# Altium PCB PCB_V2-2_电源板.PcbDoc
Units mil, origin at the board's own origin, x right, y up, seen from the top; angles counter-clockwise.
Board outline 695.03 x 1245.03 mil, 2 copper layers (Top Layer, Bottom Layer); 20 components, 84 nets, 50 pads, 79 vias.
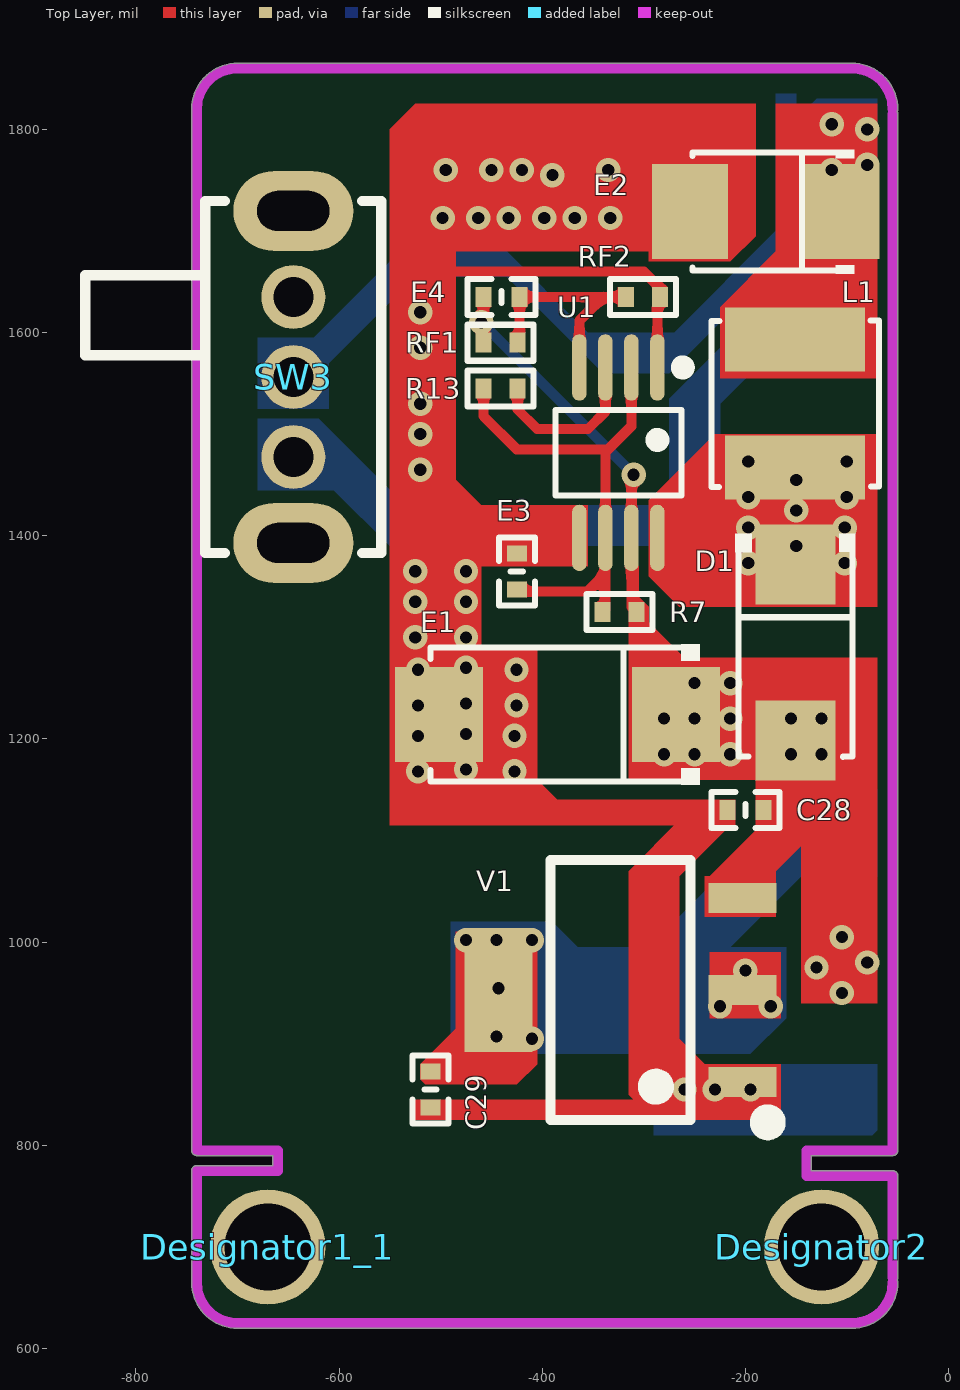
[diagram p0: Top Layer view]
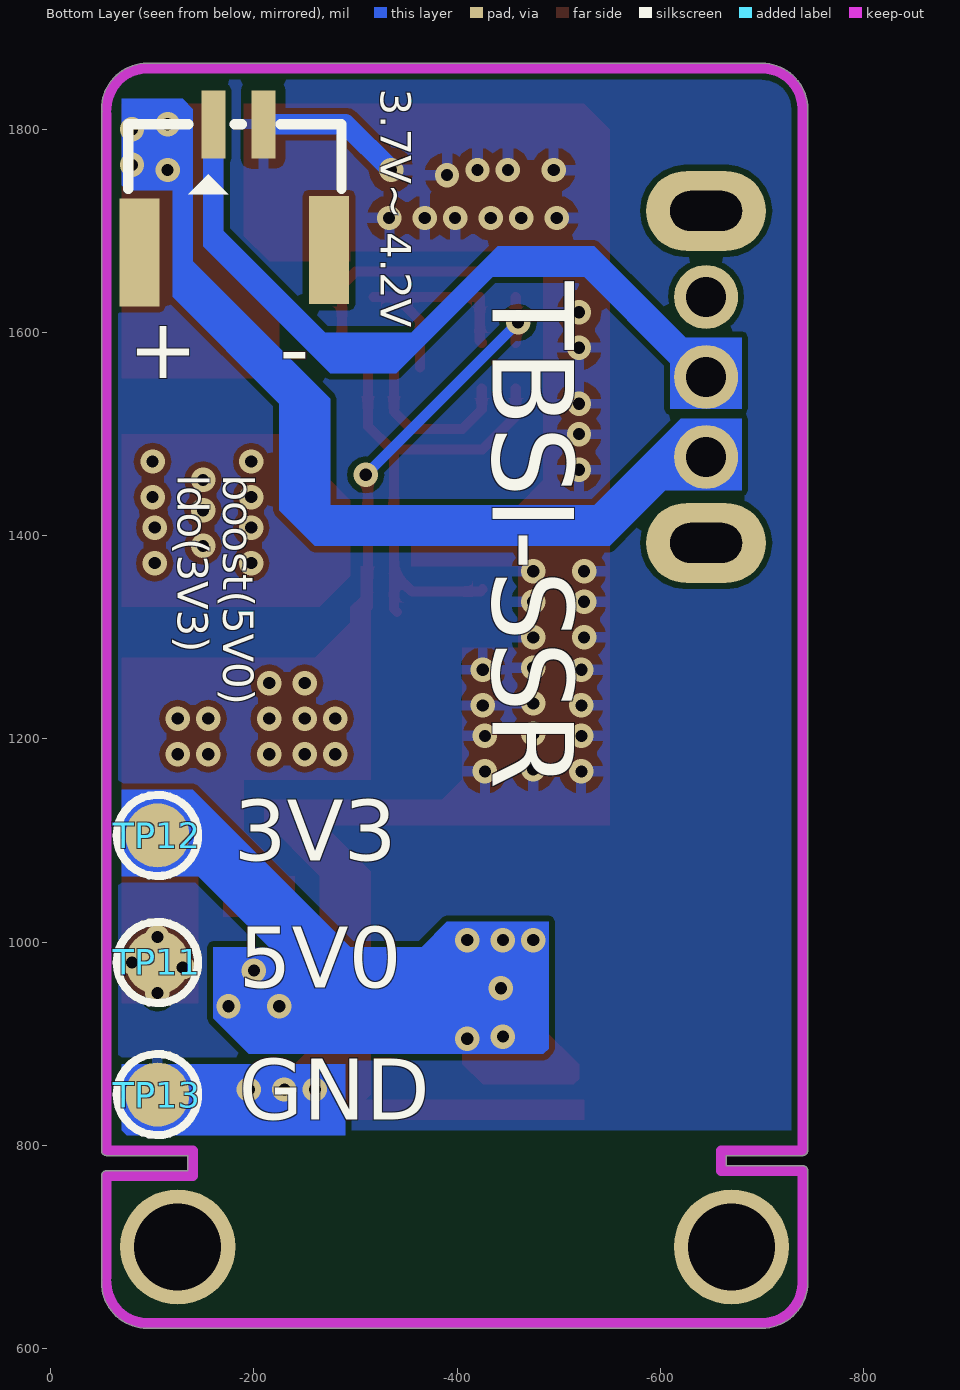
[diagram p1: Bottom Layer view, seen from below]
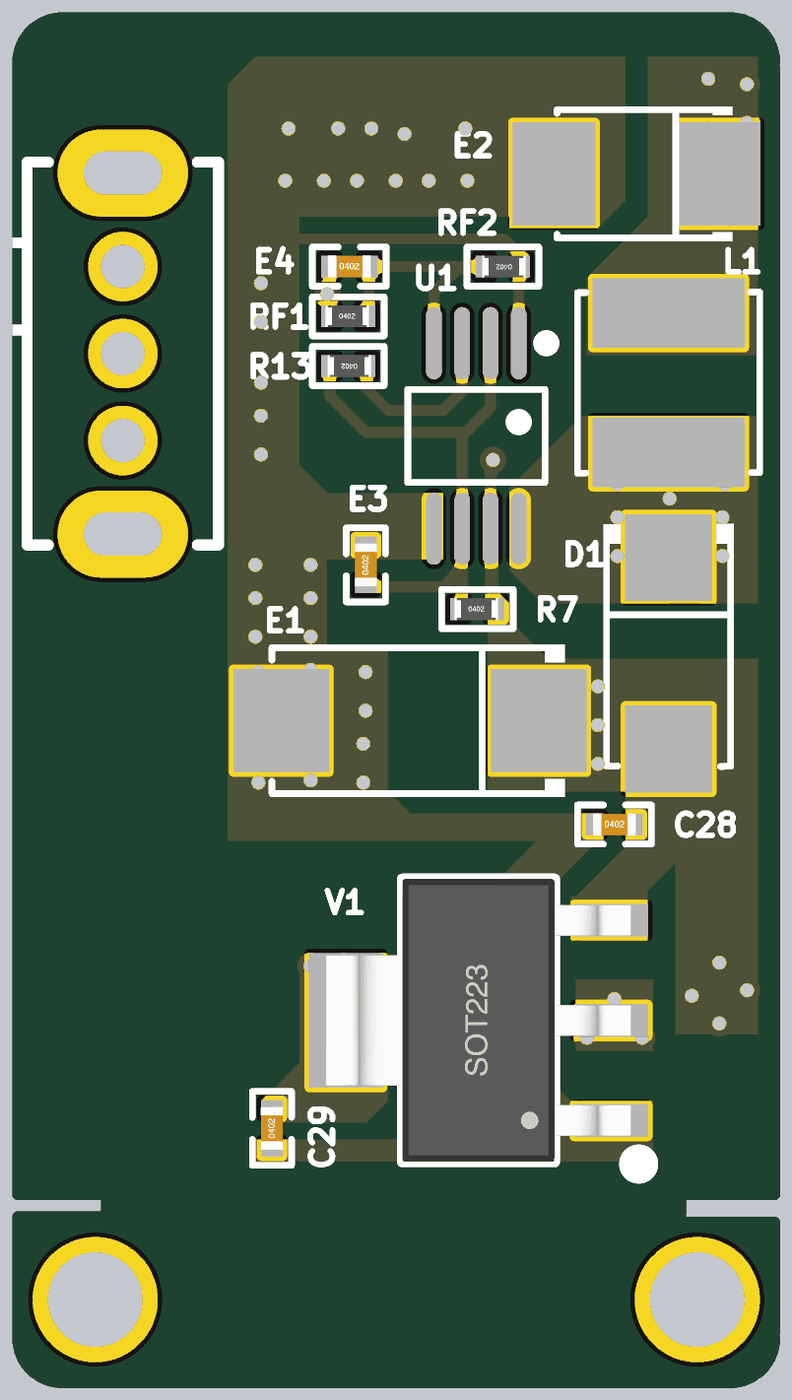
[diagram p2: 3D render of the assembled board from above, using the file's embedded part models]

## Layer stack, top to bottom
Top Solder: solder mask 0.4, Solder Resist, Dk 3.5
Top Layer: signal copper 1.4
Dielectric 1: dielectric 12.6, FR-4, Dk 4.8
Bottom Layer: signal copper 1.4
Bottom Solder: solder mask 0.4, Solder Resist, Dk 3.5

## Board outline
-745.01,665 ccw(c-700,665) -700,619.99 -95,619.99 ccw(c-95,665) -49.98,665 ccw(c-55,665) -50.65,667.5 ccw(c-55,670) -49.98,670 -49.98,770 ccw(c-55,770) -55,775.01 -134.98,775.01 -134.98,789.99 -55,789.99 ccw(c-55,795) -49.98,795 -49.98,1815 ccw(c-55,1815) -50.65,1817.5 ccw(c-55,1820) -49.98,1820 ccw(c-95,1820) -95,1865.01 -700,1865.01 ccw(c-700,1820) -745.01,1820 -745.01,795 ccw(c-740,795) -740,789.99 -665.01,789.99 -665.01,780.01 -740,780.01 ccw(c-740,775) -745.01,775

## Design rules (kind name [scope] priority, off if disabled: settings)
Clearance [All] p1: gap=6 ignorepadtopadclearanceinfootprint=FALSE except(0: Arc-Hole Track-Hole SMDPad-Hole THPad-Hole Via-Hole Fill-Hole Poly-Hole Region-Hole Text-Hole)
HoleToHoleClearance [All] p1: gap=4 allowstackedmicrovias=TRUE
MinimumSolderMaskSliver [All] p1: minsoldermaskwidth=4
PolygonConnect [All] p1: connectstyle=Relief reliefconductorwidth=10 reliefentries=4 polygonreliefangle="90 Angle" airgapwidth=10
RoutingVias [All] p1: holewidth=12 width=24 viastyle="Through Hole" minholewidth=12 minwidth=24 maxholewidth=15 maxwidth=25
SilkToSilkClearance [All] p1: silktosilkclearance=0
SilkToSolderMaskClearance [IsPad] p1: minsilkscreentomaskgap=0 clearancetoexposedcopper=TRUE
SolderMaskExpansion [All] p1: expansion=4
Width [All] p1: maxlimit=50 minlimit=6 preferedwidth=6
26 further rules are at their usual default settings.

## Classes and differential pairs
component class sheet: C28 C29 D1 E1 E2 E3 E4 L1 R7 R13 RF1 RF2 TP11 TP12 TP13 U1 V1

## Components (designator, comment, footprint, x,y, rotation, side; value= is the part's Value field where it differs from the comment)
C28 "Cap" "C 0402_L" -200,1130 r0 top value=100nF
C29 "Cap" "C 0402_L" -510,855 r90 top value=100nF
D1 "SS34" SS34-SMA -155,1280 r270 top
Designator1_1 "Comment" "M3 125X200" -670,700 r0 top
Designator2 "Comment" "M3 125X200" -125,700 r0 top
E1 "68uF/16V" C_68UF -390,1225 r0 top
E2 "22uF/16V" C_22uF -180,1720 r0 top
E3 "100nF/16V" "C 0402_L" -425,1365 r90 top
E4 "39pF" "C 0402_L" -440,1635 r0 top
L1 "Inductor" L -155,1530 r270 top value=6.8uH
R7 "500" "R 0402_L" -325,1325 r0 top
R13 "200K" "R 0402_L" -440,1545 r180 top
RF1 "150K" "R 0402_L" -441.96,1590 r0 top
RF2 "100K" "R 0402_L" -300,1635 r180 top
SW3 "SW-TH_SK12D07VG3" SW-TH_SK12D07VG3 -645,1556.26 r270 top (schematic designator SW1)
TP11 "TEST" "TEST 1.6" -105,980 r90 bottom
TP12 "TEST" "TEST 1.6" -105,1105 r90 bottom
TP13 "TEST" "TEST 1.6" -105,850 r90 bottom
U1 "LM2621" LM2621 -320,1475 r180 top
V1 "AMS1117-3V3" SOT223_L -323.03,952.72 r90 top

## Footprints (in the part's own frame and the unit in brackets; to place one, negate y for a bottom-side part, rotate by r counter-clockwise, add the part's x,y. Pads: shape width x height; smd on the part's side, far side on the other; paste and mask are expansions set on the pad)
"C 0402_L" [mm] "无极性贴片电容"
  rect 0.4x0.5 smd: 1(-0.45,0) 2(0.45,0)
  silkscreen extent -0.85,-0.45 0.85,0.45, body extent -0.5,-0.26 0.5,0.26, height 0.53
C_22uF [mm]
  rect 1.9x2.376 smd: 1(1.899,-0.026) 2(-1.899,-0.026)
  silkscreen extent -1.83,-1.58 2.21,1.53
C_68UF [mil]
  rect 86.91x93.54 smd: 1(121.59,-1.01) 2(-111.59,-1.01)
  silkscreen extent -120,-70 145,68
L [mm]
  rect 1.6x3.5 smd: 1(-1.6,0.101) 2(1.6,0.101)
  silkscreen extent -2.08,-1.99 2.08,2.2
LM2621 [mm]
  oval 0.364x1.662 smd: 1(-0.848,-2.302) 2(-0.198,-2.302) 3(0.452,-2.302) 4(1.102,-2.302) 5(1.102,1.96) 6(0.452,1.96) 7(-0.198,1.96) 8(-0.848,1.96)
  silkscreen extent -1.63,-2.45 1.7,0.9
"M3 125X200" [mm] "M3螺丝孔，孔125Mil，焊盘200Mil"
  round 2.88 hole 2.175: 1(0,0)
"R 0402_L" [mm] "1/16W贴片电阻"
  rect 0.4x0.5 smd: 1(-0.4,0) 2(0.45,0)
  silkscreen extent -0.8,-0.45 0.85,0.45, body extent -0.5,-0.25 0.5,0.25, height 0.3
SOT223_L [mm] "6.4x7x1.6mm(长宽高)"
  rect 0.75x1.7 smd: 1(-2.3,-3.048) 2(0,-3.048) 3(2.3,-3.048)
  rect 3.1x1.7 smd: 2(0,3.048)
  silkscreen extent -3.5,-3.88 3.25,1.75, body extent -3.25,-3.51 3.25,3.51, height 1.65
SS34-SMA [mm]
  rect 2x2 smd: 1(-2.327,0.106) 2(2.073,0.106)
  silkscreen extent -3.11,-1.4 2.48,1.61
SW-TH_SK12D07VG3 [mm]
  round 1.6 hole 1: 1(-2,0) 2(0,0) 3(2,0)
  oval 2x3 hole 1 slot 1.8 at 90 deg: 4(4.15,0) 5(-4.15,0)
  silkscreen extent -4.4,-5.2 4.4,2.2
"TEST 1.6" [mm] "测试点1.6mm"
  round 1.6 smd paste-1.6: 1(0,0)
  silkscreen extent -1.02,-1.01 1.02,1.02

## Part data
C28 C29: "Capacitor", LatestRevisionDate=17-Jul-2002, LatestRevisionNote="Re-released for DXP Platform.", PackageDescription="Radial Cap, Thru-Hole; 2 Leads; 0.3 in Pin Spacing", PackageReference=RAD-0.3, Published=8-Jun-2000, Publisher="Altium Limited"
D1: "肖特基二极管", BOM名称=肖特基二极管, 学习资源=www.ooocke.com, 属性=40V/3A, 版权归属=源创客
E1 E2 E3 E4: library part C-CAP, "直插电解电容", BOM名称=直插电解电容, 学习资源=www.ooocke.com, 版权归属=源创客
R7 R13 RF1 RF2: library part R, "贴片电阻", BOM名称=贴片电阻, 学习资源=www.ooocke.com, 版权归属=源创客
TP11 TP12 TP13: "测试点", BOM名称=测试点, 学习资源=www.ooocke.com, 版权归属=源创客
U1: "boost升压芯片"
V1: library part AMS1117, "三端稳压芯片", BOM名称=稳压芯片, 学习资源=www.ooocke.com, 版权归属=源创客
L1: Code_IEC=1005, Code_JEITA=0402, LatestRevisionDate=29-May-2009, LatestRevisionNote="IPC-7351 Footprint Added.", PackageDescription="Chip Inductor", PackageReference=0402-A, Published=8-Jun-2000, Publisher="Altium Limited"

## Free pads (board coordinates)
  rect 23.62x66.93 smd far side: 1(-160,1805) 2(-209.21,1805)
  rect 39.37x106.3 smd far side: 3(-87.16,1678.96) 4(-273.82,1681.14)

## Via types
v1: diameter 24, hole 12, Top Layer to Bottom Layer, tented both sides, 79 vias

## Nets (pads, with @x,y where several pads share a name; then routed paths per layer and width w, separated by ;. In a path a pad name is that pad's centre, name@x,y a point inside that pad or via, vN(x,y) a via of type N, cw(c..) or ccw(c..) an arc to the next point about the centre after c; other vN are vias at no path point)
+3.3: C29.2 TP12.1 V1.2 | length 107.7
  Top Layer w12: C29.2 -443.03,939.68 V1.2@-443.03,952.72
  other v1: -410,905 -445,907 -225,937 -175,937 -443.03,954.72 -200,972 -475,1002 -445,1002 -410,1002
+5: C28.2 D1.2 E1.1 E4.1 R7.2 RF1.1 TP11.1 U1.7 V1.3 | length 512.2
  Top Layer w10: RF1.1 E4.1 ; v1(-310,1460) -312.2,1457.8 U1.7 -312.2,1329.92 R7.2 -307.29,1262.86 E1.1
  Bottom Layer w10: v1(-460,1610) v1(-310,1460)
  other v1: -105,950 -130,975 -80,980 -105,1005 -280,1185 -250,1185 -215,1185 -155,1185 -125,1185 -280,1220 -250,1220 -215,1220 -155,1220 -125,1220 -250,1255 -215,1255
ADA4505_INA-: 
ADA4505_INB-: 
ADA4505_INC-: 
ADA4505_IND-: 
ADA4505_OUTA: 
ADA4505_OUTB: 
ADA4505_OUTC: 
ADA4505_OUTD: 
BOOT: 
CAP1: 
CAP2: 
CHIP_PU: 
GND: C28.1 C29.1 E1.2 E2.2 E3.2 pad.2 RF2.1 TP13.1 U1.1 U1.5 V1.1 | length 441.3
  Top Layer w10: -495,1660 -300,1660 -284.25,1644.25 RF2.1 -286.61,1632.64 U1.1
  Bottom Layer w20: v1(-335,1760) -290,1805 pad.2
  other v1: -260,855 -230,855 -195,855 -522.28,1168.03 -427.28,1168.03 -475,1170 -522.28,1203.03 -427.28,1203.03 -475,1205 -522.28,1233.03 -425.28,1233.03 -475,1235 -522.28,1268.03 -425.28,1268.03 -475,1270 -525,1300 -475,1300 -525,1335 -475,1335 -525,1365 -475,1365 -520,1465 -520,1500 -520,1530 -520,1585 -520,1620 -498.03,1712.72 -463.03,1712.72 -433.03,1712.72 -398.03,1712.72 -368.03,1712.72 -333.03,1712.72 -390,1755 -495,1760 -450,1760 -420,1760
GPIO2: 
GPIO4: 
GPIO5: 
GPIO12: 
GPIO13: 
GPIO14: 
GPIO15: 
GPIO16: 
GPIO17: 
GPIO18: 
GPIO19: 
GPIO21: 
GPIO22: 
GPIO23: 
GPIO25: 
GPIO26: 
GPIO27: 
GPIO32: 
GPIO33: 
GPIO34: 
GPIO35: 
IN_P: pad.1 SW3.2
LM2902_INA-: 
LM2902_INB-: 
LM2902_INC-: 
LM2902_IND-: 
LM2902_OUTA: 
LM2902_OUTB: 
LM2902_OUTC: 
LM2902_OUTD: 
NetA1_1: 
NetBattery_2: E2.1 L1.1 SW3.3
  other v1: -115,1760 -80,1765 -80,1800 -115,1805
NetC12_2: 
NetC15_1: 
NetC16_2: 
NetD1_1: D1.1 L1.2 U1.8
  other v1: -197.28,1373.03 -102.28,1373.03 -150,1390 -197.28,1408.03 -102.28,1408.03 -150,1425 -197.28,1438.03 -100.28,1438.03 -150,1455 -197.28,1473.03 -100.28,1473.03
NetE3_1: E3.1 R7.1 R13.2 U1.2 U1.6 | length 511.6
  Top Layer w10: R13.2 -457.71,1517.71 -425,1485 -335,1485 ; E3.1 -422.72,1345 -355.69,1345 -337.8,1362.89 ; R7.1 -337.8,1327.95 -337.8,1362.89 ; U1.2 -312.2,1507.8 -335,1485 ; -337.8,1362.89 U1.6 -337.8,1482.2 -335,1485
NetE4_2: E4.2 RF1.2 RF2.2 U1.4 | length 229.4
  Top Layer w10: RF1.2 -422.29,1591.96 E4.2 -340,1635 ; U1.4 -363.39,1611.61 -340,1635 ; RF2.2 -340,1635
NetJP1_1: 
NetJP1_3: 
NetJP1_5: 
NetJP1_7: 
NetLED1_2: 
NetR2_1: 
NetR8_1: 
NetR13_1: R13.1 U1.3 | length 165.7
  Top Layer w10: R13.1 -424.25,1524.25 -405,1505 -355,1505 -337.8,1522.2 U1.3
NetR14_2: 
NetR15_1: 
NetR18_1: 
NetR20_1: 
NetR25_1: 
NetR26_2: 
NetR27_1: 
NetR28_2: 
SCK/CLK: 
SCS/CMD: 
SDI/SD1: 
SDO/SD0: 
SENSOR_VN: 
SENSOR_VP: 
SHD/SD2: 
SWP/SD3: 
U0RXD: 
U0TXD: 
VBIAS: 
VDD_SDIO: 
VREF2V5: 
XTAL_N: 
XTAL_P: 
pads on no net: Designator1_1.1 Designator2.1 SW3.1 SW3.4 SW3.5

## Polygon pours and split planes (outlines as drawn)
GND on Bottom Layer "Bottom Layer-GND" (solid, pour order 0): -740,1830 -710,1860 -80,1860 -55,1835 -55,815 -740,815

## Keep-outs
Keep-Out Layer:
  lines w10: -740,730 -740,675 ; -55,665 cw(c-95,665) -95,625 -700,625 cw(c-700,665) -740,665 -740,675 ; -55,670 -55,770 -140,770 -140,795 -55,795 ; -55,1290 -55,1815 -55,795 ; -55,1295 -55,815 -55,795 ; -55,1820 ccw(c-95,1820) -95,1860 -700,1860 ccw(c-700,1820) -740,1820 -740,795 -660,795 -660,775 -740,775 -740,675

## Other copper
Top Layer:
  region net +5: -305,1370 -305,1340 -295,1330 -295,1315 -260,1280 -235,1280 -235,1160 -315,1160 -315,1370
  region net +5: -70,1175 -70,940 -145,940 -145,1175
  region net +3.3: -235,925 -165,925 -165,990 -235,990
  region net GND: -210,1120 -265,1065 -265,905 -240,880 -165,880 -165,825 -290,825 -315,850 -315,1070 -265,1120
  region net GND: -165,880 -240,880 -275,845 -525,845 -525,825 -165,825
  region net GND: -210,1140 -385,1140 -420,1175 -550,1175 -550,1115 -540,1115 -210,1115
  region net +5: -75,1165 -170,1070 -170,1025 -240,1025 -240,1065 -235,1065 -190,1110 -190,1165
  region net +5: -70,1280 -315,1280 -315,1160 -70,1160
  region net NetD1_1: -70,1500 -235,1500 -235,1495 -295,1435 -295,1360 -265,1330 -70,1330
  region net GND: -405,1290 -405,1160 -550,1160 -550,1800 -525,1825 -270,1825 -270,1680 -485,1680 -485,1455 -460,1430 -355,1430 -355,1370 -460,1370 -460,1290
  region net NetBattery_2: -70,1555 -225,1555 -225,1625 -170,1680 -170,1705 -70,1705
  region net NetBattery_2: -170,1825 -170,1695 -145,1670 -70,1670 -70,1825
  region net GND: -295,1670 -215,1670 -190,1695 -190,1825 -295,1825
  region net +3.3: -485,1010 -485,915 -520,880 -520,865 -515,860 -425,860 -405,880 -405,1010
Bottom Layer:
  region net IN_P: -170,1835 -170,1700 -270,1600 -355,1600 -440,1685 -535,1685 -625,1595 -680,1595 -680,1525 -610,1525 -610,1570 -525,1655 -435,1655 -340,1560 -275,1560 -150,1685 -150,1835
  region net GND: -290,880 -70,880 -70,815 -75,810 -290,810
  region net +3.3: -70,1065 -145,1065 -220,990 -220,890 -295,890 -295,995 -140,1150 -70,1150
  region net +3.3: -160,995 -365,995 -390,1020 -490,1020 -490,895 -485,890 -195,890 -160,925
  region net +3.3: -490,895 -485,890 -395,890 -395,1015 -400,1020 -490,1020
  region net NetBattery_2: -680,1515 -680,1445 -605,1445 -550,1390 -260,1390 -225,1425 -225,1530 -120,1635 -120,1740 -75,1740 -70,1745 -70,1830 -130,1830 -140,1820 -140,1670 -275,1535 -275,1430 -535,1430 -620,1515

## Silkscreen, mask and mechanical layers (free items; w line width, h text height)
Bottom Overlay:
  region: -174.77,1736.1 -135.4,1736.1 -155.09,1755.79
  lines w10: -286.34,1741.21 -286.34,1805 ; -285.39,1805 -226.34,1805 ; -188.3,1805 -180.91,1805 ; -135.39,1805 -76.34,1805 -76.34,1741.21
  text "3.7V~ 4.2V" at -325,1840 h30 r90
  text "TBSI-SSR" at -435,1650 h80 r90
  text "-" at -255,1555 h60
  text "+" at -145,1555 h60
  text "boost(5V0) / ldo(3V3)" at -125,1460 h30 r90
  text "3V3" at -180,1080 h60
  text "5V0" at -185,955 h60
  text "GND" at -185,825 h60